# Altium PCB USB-hub.PcbDoc
Units mil, origin at the board's own origin, x right, y up, seen from the top; angles counter-clockwise.
Board outline 2875 x 1565 mil, 2 copper layers (Top Layer, Bottom Layer); 51 components, 40 nets, 205 pads, 202 vias.
Unrouted connection lines stored in the file: 3.
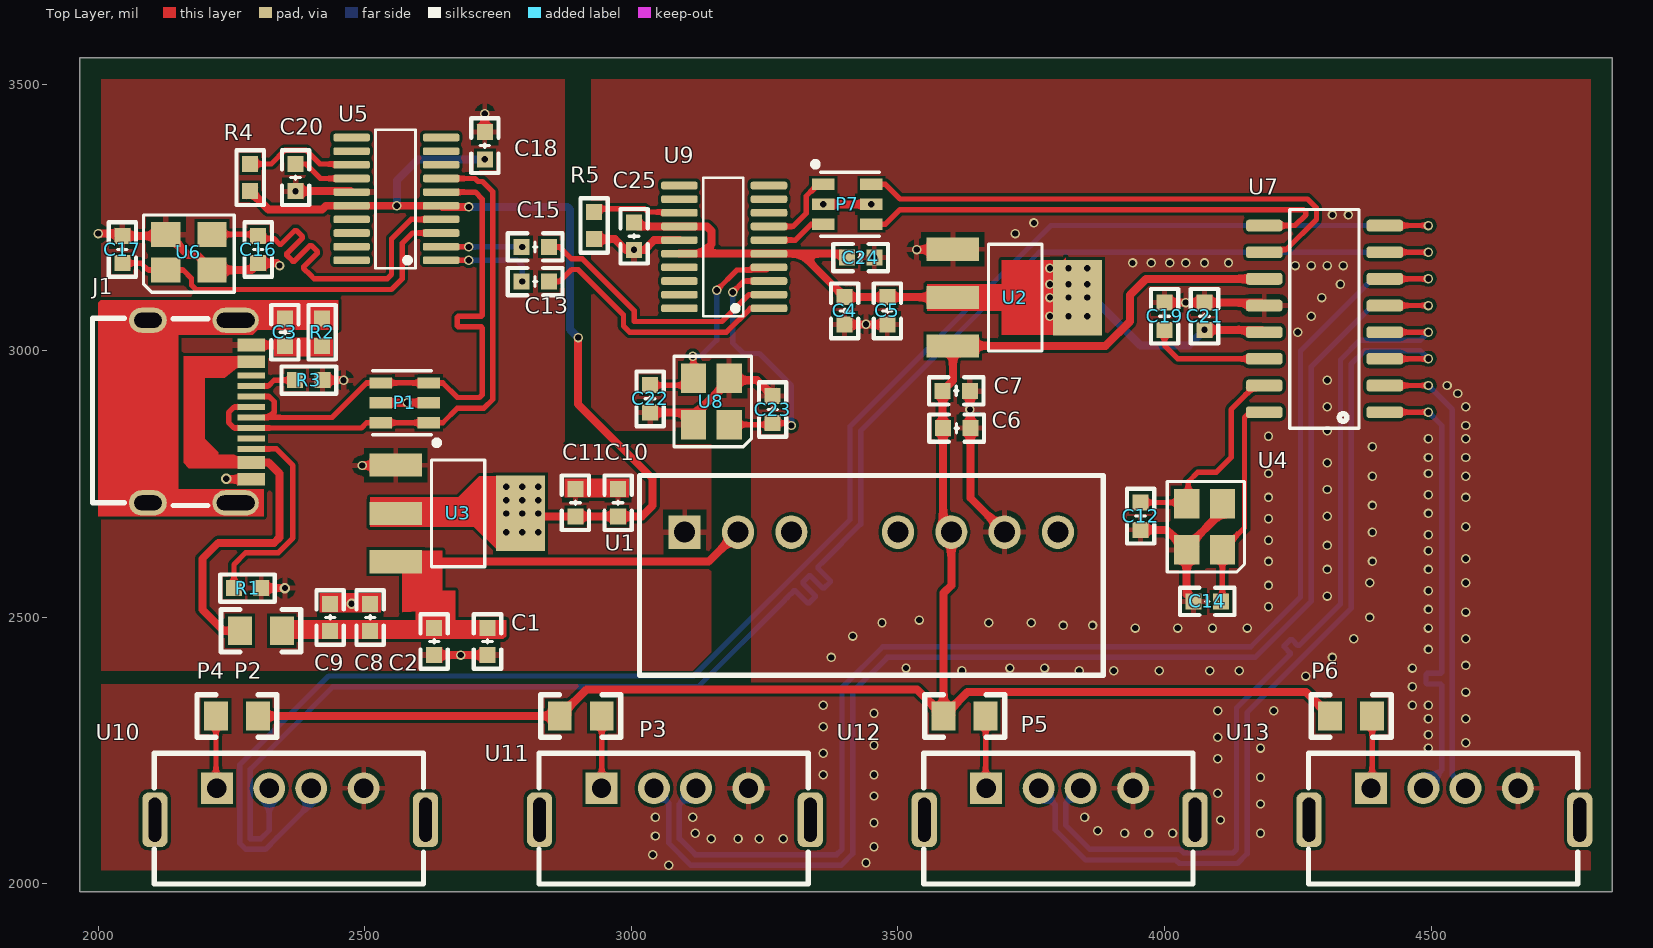
[diagram p0: Top Layer view]
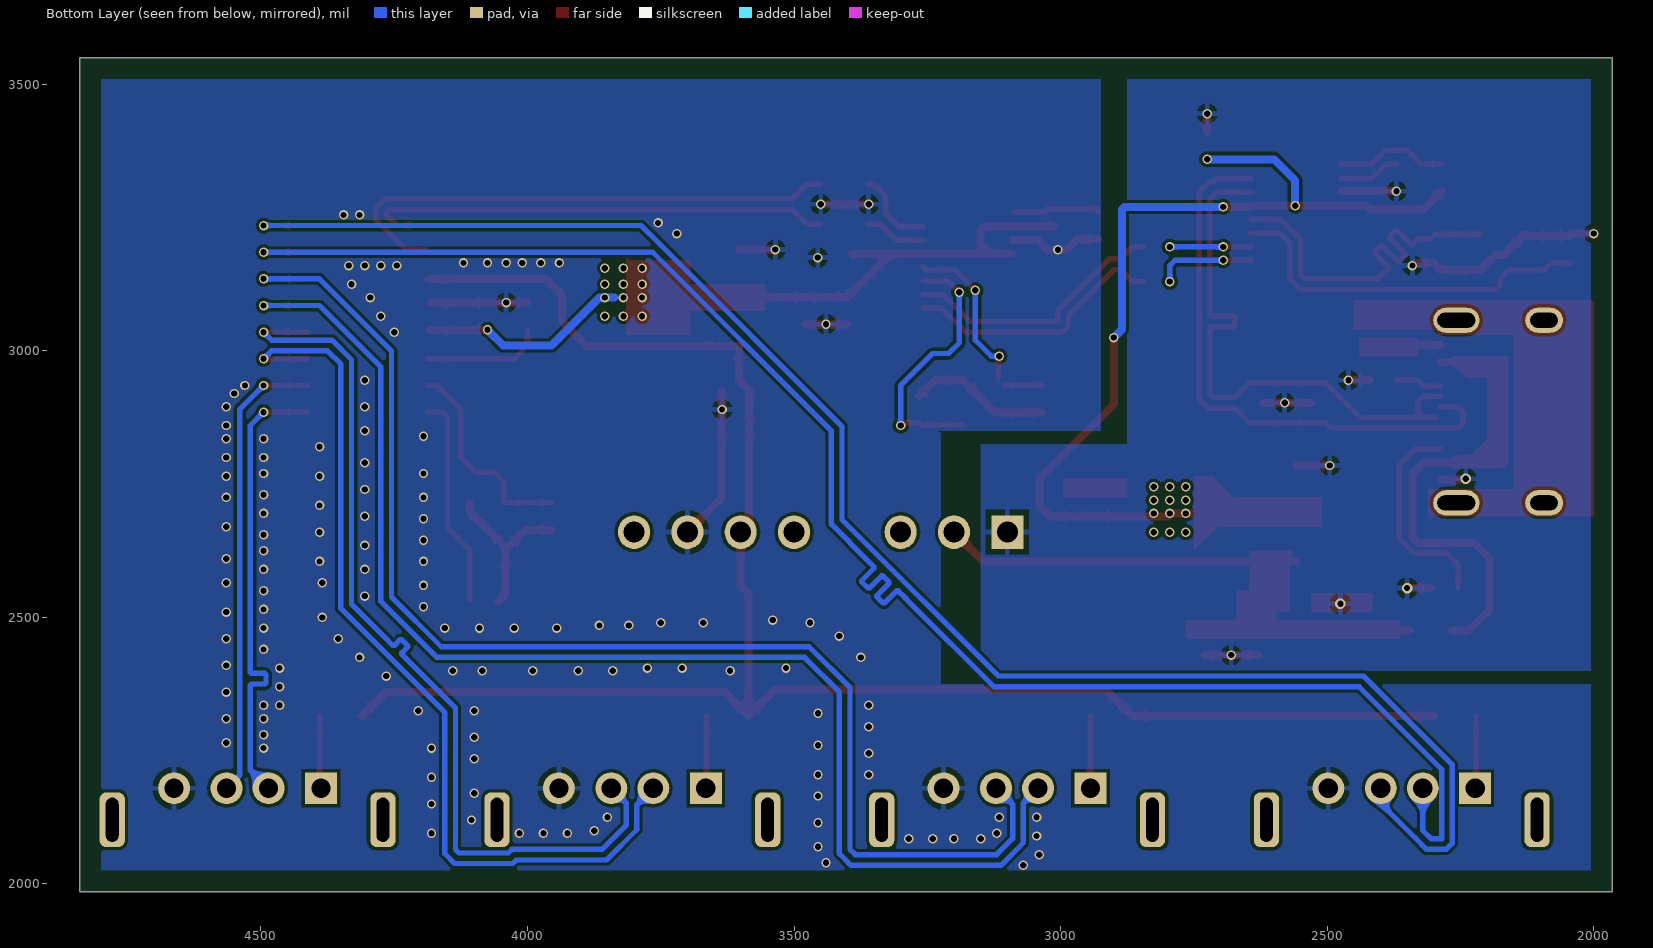
[diagram p1: Bottom Layer view, seen from below]
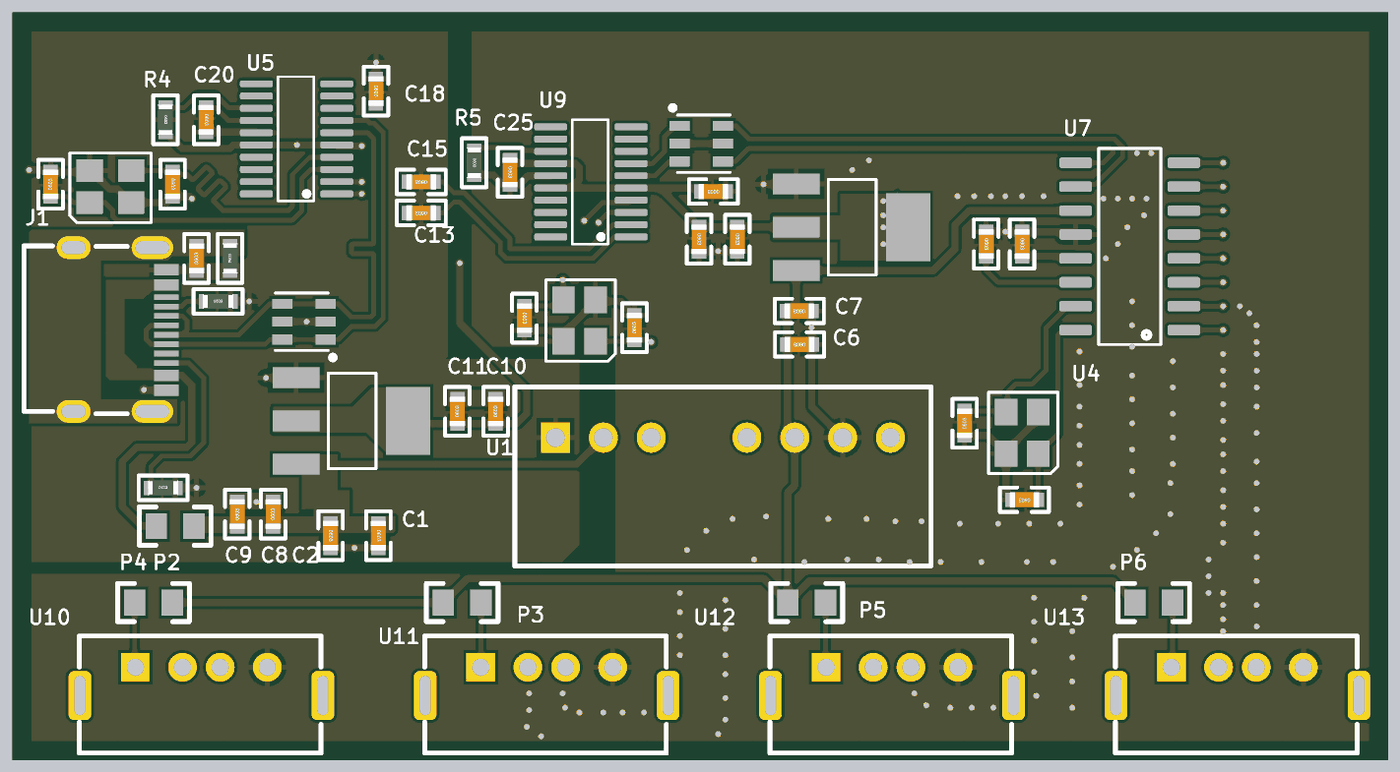
[diagram p2: 3D render of the assembled board from above, using the file's embedded part models]

## Layer stack, top to bottom
Top Solder: solder mask 0.4, Solder Resist, Dk 3.5
Top Layer: signal copper 1.4
Dielectric 1: dielectric 12.6, FR-4, Dk 4.8
Bottom Layer: signal copper 1.4
Bottom Solder: solder mask 0.4, Solder Resist, Dk 3.5

## Board outline
1965,1985 4840,1985 4840,3550 1965,3550

## Design rules (kind name [scope] priority, off if disabled: settings)
BoardOutlineClearance [All] p1: gap=40
Clearance Clearance_TypeC_J1 [InComponent('J1') vs InComponent('J1')] p1: gap=0
Clearance Clearance_1 [All] p2: gap=6
DiffPairsRouting [All] p1: maxlimit=10 minlimit=10 mostfreqgap=10 toplayer_minwidth=10 toplayer_maxwidth=10 toplayer_prefwidth=10 bottomlayer_minwidth=10 bottomlayer_maxwidth=10 bottomlayer_prefwidth=10 maxuncoupledlength=500
MinimumSolderMaskSliver [All] p1: minsoldermaskwidth=3.2
PolygonConnect [All] p1: connectstyle=Relief reliefconductorwidth=10 reliefentries=4 polygonreliefangle="90 Angle" airgapwidth=10
RoutingVias [All] p1: holewidth=12 width=20 viastyle="Through Hole" minholewidth=11.81 minwidth=15.75 maxholewidth=30 maxwidth=50
SilkToSilkClearance [All] p1: silktosilkclearance=0
SilkToSolderMaskClearance [IsPad] p1: minsilkscreentomaskgap=0 clearancetoexposedcopper=TRUE
SolderMaskExpansion [All] p1: expansion=0
Width [InNetClass('chafen1')] p1: maxlimit=10 minlimit=10 preferedwidth=10
Width power_GND [InNetClass('power')] p2: maxlimit=25 minlimit=15 preferedwidth=20
Width Width_1 [All] p3: maxlimit=10 minlimit=10 preferedwidth=10
26 further rules are at their usual default settings.

## Classes and differential pairs
net class power: +5V_ISO +5V_PRI GND_ISO GND_PRI USB_SHIELD_PRI VBUS_PRI VDD33_ISO VDD33_PRI
net class chafen1: USB_DM_ISO USB_DM_PRI
differential pair class chafen1: NewDifferentialPair1 NewDifferentialPair2 NewDifferentialPair3 NewDifferentialPair4 NewDifferentialPair5 NewDifferentialPair6 NewDifferentialPair7 NewDifferentialPair8 NewDifferentialPair9 NewDifferentialPair10
differential pair NewDifferentialPair1: +USB_DP_PRI -USB_DM_PRI
differential pair NewDifferentialPair2: +1.XO -1.XI
differential pair NewDifferentialPair3: +1.DPX -1.DMX
differential pair NewDifferentialPair4: +2.DPX -2.DMX
differential pair NewDifferentialPair5: +2.XI -2.XO
differential pair NewDifferentialPair6: +USB_DP_ISO -USB_DM_ISO
differential pair NewDifferentialPair7: +XIN -XOUT
differential pair NewDifferentialPair8: +USB2_DP -USB2_DM
differential pair NewDifferentialPair9: +USB3_DM -USB3_DP
differential pair NewDifferentialPair10: +USB4_DP -USB4_DM

## Components (designator, comment, footprint, x,y, rotation, side; value= is the part's Value field where it differs from the comment)
C1 "10uF" "C 0603_L" 2730,2455 r270 top
C2 "0.1uF" "C 0603_L" 2630,2455 r270 top
C3 "1nF" "C 0603_L" 2350,3035 r90 top
C4 "10uF" "C 0603_L" 3400,3075 r270 top
C5 "0.1uF" "C 0603_L" 3480,3075 r270 top
C6 "10uF" "C 0603_L" 3610,2855 r180 top
C7 "0.1uF" "C 0603_L" 3609.41,2925 r180 top
C8 "10uF" "C 0603_L" 2510,2500 r90 top
C9 "0.1uF" "C 0603_L" 2435,2500 r90 top
C10 "10uF" "C 0603_L" 2975,2715 r90 top
C11 "0.1uF" "C 0603_L" 2895,2715 r90 top
C12 "20pF" "C 0603_L" 3955,2690 r90 top
C13 "0.1uF" "C 0603_L" 2819.41,3130 r180 top
C14 "20pF" "C 0603_L" 4080,2530 r180 top
C15 "0.1uF" "C 0603_L" 2819.41,3195 r180 top
C16 "30pF" "C 0603_L" 2300,3190 r270 top
C17 "30pF" "C 0603_L" 2045,3190 r90 top
C18 "1uF" "C 0603_L" 2725,3385 r270 top
C19 "4.7uF" "C 0603_L" 4000,3065 r270 top
C20 "0.1uF" "C 0603_L" 2370,3325 r270 top
C21 "4.7uF" "C 0603_L" 4075,3065 r270 top
C22 "30pF" "C 0603_L" 3035,2910 r270 top
C23 "30pF" "C 0603_L" 3265,2890 r90 top
C24 "1uF" "C 0603_L" 3430,3175 r180 top
C25 "0.1uF" "C 0603_L" 3005,3215 r270 top
J1 "U262‑16P‑BH" USB-hub 2190,2885 r270 top
P1 "Header 3X2" SOT-6 2574.76,2902.6 r90 top
P2 "SMD0805B100TF" SMD0805B100TF 2305,2475 r0 top
P3 "SMD0805B100TF" SMD0805B100TF 2905,2315 r0 top
P4 "SMD0805B100TF" SMD0805B100TF 2260,2315 r180 top
P5 "SMD0805B100TF" SMD0805B100TF 3625,2315 r0 top
P6 "SMD0805B100TF" SMD0805B100TF 4350,2315 r0 top
P7 "Header 3X2" SOT-6 3405,3275 r270 top
R1 "5.1k" "R 0603_L" 2280,2555 r0 top
R2 "1M" "R 0603_L" 2420,3035 r90 top
R3 "5.1k" "R 0603_L" 2395,2945 r0 top
R4 "5.1k" "R 0603_L" 2285,3325 r270 top
R5 "5.1k" "R 0603_L" 2930,3235 r270 top
U1 "VRB0505S‑5WR3" VRB0505S_5WR3 3450,2660 r0 top
U2 "AMS1117-3.3" AMS1117-3.3 3720,3100 r180 top
U3 "AMS1117-3.3" AMS1117-3.3 2675,2695 r180 top
U4 "C20617584" C20617584 4075,2670 r90 top
U5 "CH318T" CH318T 2530,3285 r90 top
U6 "C20617584" C20617584 2170,3185 r0 top
U7 "HUBSL2.1A" HUBSL2.1A 4300,3060 r90 top
U8 "C20617584" C20617584 3150,2905 r90 top
U9 "CH318T" CH318T 3145,3195 r90 top
U10 "usb" usb 2360,2150 r0 top
U11 "usb" usb 3081.67,2150 r0 top
U12 "usb" usb 3803.33,2150 r0 top
U13 "usb" usb 4525,2150 r0 top

## Footprints (in the part's own frame and the unit in brackets; to place one, negate y for a bottom-side part, rotate by r counter-clockwise, add the part's x,y. Pads: shape width x height; smd on the part's side, far side on the other; paste and mask are expansions set on the pad)
AMS1117-3.3 [mm]
  rect 2.5x1.1 smd: 1(2.97,-2.3) 2(2.97,0) 3(2.97,2.3)
  rect 2.34x3.6 smd: 4(-2.97,0)
  silkscreen extent -1.27,-2.54 1.27,2.54
C20617584 [mm]
  rect 1.4x1.2 smd: 1(-1.1,-0.85) 2(1.1,-0.85) 3(1.1,0.85) 4(-1.1,0.85)
  silkscreen extent -2.16,-1.91 2.16,1.78
"C 0603_L" [mil] "无极性贴片电容                                       淘宝ID:黄晶宝石"
  rect 30x30 smd: 1(-25.59,0) 2(25.59,0)
  silkscreen extent -51,-26 51,26, body extent -31,-16 31,16, height 32
CH318T [mm]
  rrect50% 0.364x1.742 smd: 1(-2.925,-2.871) 2(-2.275,-2.871) 3(-1.625,-2.871) 4(-0.975,-2.871) 5(-0.325,-2.871) 6(0.325,-2.871) 7(0.975,-2.871) 8(1.625,-2.871) 9(2.275,-2.871) 10(2.925,-2.871) 11(2.925,1.397) 12(2.275,1.397) 13(1.625,1.397) 14(0.975,1.397) 15(0.325,1.397) 16(-0.325,1.397) 17(-0.975,1.397) 18(-1.625,1.397) 19(-2.275,1.397) 20(-2.925,1.397)
  silkscreen extent -3.3,-1.65 3.3,0.25
HUBSL2.1A [mm]
  rrect50% 0.56x1.745 smd: 1(-4.445,-2.872) 2(-3.175,-2.872) 3(-1.905,-2.872) 4(-0.635,-2.872) 5(0.635,-2.872) 6(1.905,-2.872) 7(3.175,-2.872) 8(4.445,-2.872) 9(4.445,2.872) 10(3.175,2.872) 11(1.905,2.872) 12(0.635,2.872) 13(-0.635,2.872) 14(-1.905,2.872) 15(-3.175,2.872) 16(-4.445,2.872)
  silkscreen extent -5.21,-1.65 5.21,1.65
"R 0603_L" [mil] "1/10W贴片电阻                 淘宝ID:黄晶宝石"
  rect 30x30 smd: 1(-25.59,0) 2(25.59,0)
  silkscreen extent -51,-26 51,26, body extent -31,-16 32,16, height 16
SMD0805B100TF [mm]
  rect 1.133x1.377 smd: 1(-1,0) 2(1,0)
  silkscreen extent -1.91,-1.02 1.91,1.02
SOT-6 [mm]
  rect 0.532x1.072 smd: 1(-0.95,-1.149) 2(0,-1.149) 3(0.95,-1.149) 4(0.95,1.149) 5(0,1.149) 6(-0.95,1.149)
  silkscreen extent -2.03,-1.65 1.52,1.52
usb [mil]
  rect 60x60 hole 35.98: 1(-137.8,29.57)
  round 60 hole 35.98: 2(-39.41,29.57) 3(39.41,29.57) 4(137.8,29.57)
  rrect50% 47.24x102.36 hole 23.62 slot 82.68 at 90 deg: 5(-253.9,-29.57) 6(253.9,-29.57)
  silkscreen extent -255,-150 250,95
USB-hub [mm]
  oval 1.2x2.2 hole 0.7 slot 1.8 at 90 deg: 13(4.32,1.719) 16(-4.379,1.719)
  oval 1.2x1.8 hole 0.7 slot 1.3 at 90 deg: 14(4.32,-2.461) 15(-4.379,-2.461)
  rect 0.6x1.3 smd: A1B12(-3.2,2.461) A4B9(-2.4,2.461) B1A12(3.2,2.461) B4A9(2.4,2.461)
  rect 0.3x1.3 smd: A5(-1.25,2.461) A6(-0.25,2.461) A7(0.25,2.461) A8(1.25,2.461) B5(1.75,2.461) B6(0.75,2.461) B7(-0.75,2.461) B8(-1.75,2.461)
  silkscreen extent -4.47,-5.1 4.44,0.38
VRB0505S_5WR3 [mm]
  rect 1.524x1.6 hole 1: 1(-8.89,0)
  oval 1.524x1.6 hole 1: 2(-6.35,0) 3(-3.81,0) 5(1.27,0) 6(3.81,0) 7(6.35,0) 8(8.89,0)
  silkscreen extent -11.05,-6.83 11.05,2.7

## Part data
C1 C2 C3 C4 C5 C6 C7 C8 C9 C10 C11 C12 C13 C14 C15 C16 C17 C18 C19 C20 C21 C22 C23 C24 C25: library part C, "贴片电容"
J1: library part type_c
P1 P7: "Header, 3-Pin, Dual row"
R1 R2 R3 R4 R5: library part R, "贴片电阻"
U1: library part VRB0505S?5WR3

## Via types
v1: diameter 17.72, hole 11.81, Top Layer to Bottom Layer, tented both sides, 199 vias
v2: diameter 19.68, hole 11.81, Top Layer to Bottom Layer, tented both sides, 3 vias

## Nets (pads, with @x,y where several pads share a name; then routed paths per layer and width w, separated by ;. In a path a pad name is that pad's centre, name@x,y a point inside that pad or via, vN(x,y) a via of type N, cw(c..) or ccw(c..) an arc to the next point about the centre after c; other vN are vias at no path point)
1.DMX: C13.2 U5.1 | length 186.2
  Top Layer w10: U5.1 2682.32,3169.84 2682.48,3170 v1(2695,3170)
  Bottom Layer w10: v1(2695,3170) 2785,3170 2795,3160 v1(2795,3130)
1.DPX: C15.2 U5.2 | length 152.1
  Top Layer w10: U5.2 2682.32,3195.43 2682.76,3195 v1(2695,3195)
  Bottom Layer w10: v1(2695,3195) v1(2795,3195)
1.XI: C16.1 U5.4 U6.3 | length 708
  Top Layer w10: U6.3 C16.1@2297.13,3218.46 ; C16.1 2305,3210.59 2329.41,3210.59 2340,3200 2342.72,3200 2368.54,3225.82 2371.37,3225.82 2382.69,3214.51 2382.69,3211.68 2355.5,3184.5 2353.38,3182.38 2353.38,3179.55 2364.69,3168.23 2367.52,3168.23 2369.64,3170.36 2396.83,3197.54 2399.66,3197.54 2410.97,3186.23 2410.97,3183.4 2385.2,3157.63 2385.2,3154.8 2397.93,3142.07 2405,3135 2541.72,3135 2550,3143.28 2550,3210 2575.17,3235.17 2586.61,3246.61 U5.4
1.XO: C17.1 U5.3 U6.1 | length 708.9
  Top Layer w10: C17.1 2080.59,3164.41 2093.46,3151.54 U6.1 2159.25,3151.54 2174.75,3136.04 2174.75,3123.36 2183.11,3115 2405,3115 2550,3115 2570,3135 2570,3201.72 2589.31,3221.02 U5.3
2.DMX: C13.1 U9.1 | length 501.8
  Top Layer w10: C13.1 2865,3130 2887.5,3152.5 2900,3152.5 2985,3067.5 2985,3046.72 2996.72,3035 3178.28,3035 3223.13,3079.84 U9.1
2.DPX: C15.1 U9.2 | length 504.1
  Top Layer w10: C15.1 2865,3195 2887.5,3172.5 2908.28,3172.5 3005,3075.78 3005,3055 3170,3055 3220.43,3105.43 U9.2
2.XI: C22.1 U8.3 U9.4 | length 375.9
  Top Layer w10: C22.1 U8.3@3103.82,2935.59 ; U8.3 v1@3116.54,2988.46 ; v1(3160,3113.75) 3197.86,3151.61 3253.03,3151.61 U9.4
  Bottom Layer w10: v1(3115,2990) 3130,2990 3160,3020 v1(3160,3113.75)
2.XO: C23.1 U8.1 U9.3 | length 499.3
  Top Layer w10: U8.1 C23.1@3262.29,2861.69 ; v1(3190,3110) 3211.02,3131.02 U9.3 ; C23.1 v1@3295.59,2864.41
  Bottom Layer w10: v1(3190,3110) 3190,3015 3210,2995 3240,2995 3300,2935 v1(3300,2860)
+5V_ISO: C6.2 C7.2 P3.1 P4.1 P5.1 P6.1 U1.6 U2.3 U7.11 | length 3470.2
  Top Layer w15: P4.1 P3.1 2915.63,2365 3535.63,2365 P5.1 ; U7.11 3965,3135 3935,3105 3935,3055 3889.45,3009.45 U2.3 3603.07,2944.25 C7.2 3583.82,2855.6 C6.2 3584.41,2675.59 U1.6 3600,2560 3585.63,2545.63 P5.1 ; P6.1 4265.63,2360 3630.63,2360 P5.1
+5V_PRI: C1.1 C2.1 C8.1 C9.1 P2.2 U1.2 U3.3 | length 1043.8
  Top Layer w15: P2.2 C8.1@2509.41,2475 ; C8.1 C2.1@2623.81,2474.41 ; U3.3 3144.45,2604.45 U1.2 ; C2.1 C1.1
GND_ISO: C4.2 C5.2 C6.1 C7.1 C12.1 C14.2 C19.1 C21.1 C22.2 C23.2 C24.1 C25.2 P7.2 P7.5 R5.2 U1.7 U2.1 U4.2 U4.4 U7.12 U8.2 U8.4 U9.15 U10.4 U11.4 U12.4 U13.4 | length 1472.1
  Top Layer w15: R5.2 2969.41,3209.41 2989.41,3189.41 v1(3005,3189.41) 3024.41,3189.41 3042.8,3207.8 U9.15 ; C22.2 3122.91,2884.41 3183.46,2944.96 3235.63,2944.96 C23.2 ; P7.2 P7.5 ; C4.2 C5.2 ; v1(3535,3190) U2.1@3602.52,3190 ; v1(3635,2890) C7.1 ; v1@3635.59,2889.41 C6.1 3635.59,2724.41 U1.7 ; C12.1 4003.82,2664.41 U4.4 ; C19.1 v1(4040,3090.59) C21.1 U7.12@4181.34,3090.59 ; C14.2 4041.54,2542.88 U4.4 ; U4.2 4108.46,2698.46 4041.54,2631.54 U4.4
  other v1: 3070,2035 3440,2040 3040,2055 3455,2070 3150,2085 3200,2085 3240,2085 3285,2085 3045,2090 3120,2095 3925,2095 3970,2095 4015,2095 4180,2095 3875,2100 3455,2115 4105,2120 3045,2125 3115,2125 3850,2125 4180,2150 3455,2165 4100,2170 4180,2200 3360,2205 3455,2205 4100,2235 3360,2245 4180,2255 4495,2255 3455,2260 4565,2265 4100,2275 4495,2280 3360,2295 4495,2310 4565,2310 3455,2320 4100,2325 4205,2325 3360,2335 4465,2335 4495,2335 4565,2360 4465,2370 4265,2390 3620,2400 3840,2400 3905,2400 3990,2400 4085,2400 4140,2400 3515,2405 3710,2405 3775,2405 4465,2405 4565,2410 3375,2425 4315,2425 4495,2440 4355,2460 4565,2460 3415,2465 3945,2480 4025,2480 4090,2480 4155,2480 4495,2480 3810,2485 3865,2485 3470,2490 3670,2490 3750,2490 3540,2495 4385,2500 4565,2510 4495,2515 4195,2520 4305,2540 4495,2550 4195,2560 4385,2565 4565,2565 4305,2590 4495,2590 4195,2605 4390,2605 4565,2610 4495,2625 4305,2635 4195,2645 4495,2655 4390,2660 4565,2670 4195,2685 4305,2690 4495,2695 4390,2710 4195,2725 4565,2725 4495,2730 4305,2740 4390,2765 4565,2765 4195,2770 4495,2770 4305,2790 4495,2800 4565,2800 4390,2820 4495,2835 4565,2835 4195,2840 4305,2850 4565,2860 4305,2895 4565,2895 4550,2920 4530,2935 4305,2945 4250,3035 3440,3050 4275,3065 4295,3100 4330,3125 4245,3160 4275,3160 4305,3160 4335,3160 3940,3165 3975,3165 4010,3165 4040,3165 4075,3165 4120,3165 3455.59,3175 3720,3220 3755,3240 4315,3255 4345,3255 3360,3275 3450,3275
GND_PRI: C1.2 C2.2 C3.1 C8.2 C9.2 C10.2 C11.2 C16.2 C17.2 C18.1 C20.2 J1.A1B12 J1.B1A12 P1.2 P1.5 R1.2 R2.1 R3.2 U1.1 U3.1 U5.15 U6.2 U6.4 | length 1024.6
  Top Layer w15: v1(2000,3220) 2040.59,3220 C17.2 U6.4@2123.82,3215.59 ; U6.4 2130.04,3218.46 2168.5,3180 2184.84,3180 U6.2 2287.12,3151.54 C16.2 v1@2335.59,3164.41 ; v2@2240.98,2759.02 J1.B1A12 ; J1.A1B12 C3.1@2348.43,3010.98 ; R1.2 v2(2350,2555) ; v1(2370,3299.41) U5.15@2473.38,3299.41 ; R3.2 v1(2460,2945) ; C9.2 C8.2 ; v1(2495,2785) U3.1@2557.52,2785 ; P1.5 P1.2 ; C2.2 C1.2 ; C18.1 v1(2725,3445)
  other v1: 2680,2429.41 2579.76,2902.6 2340,3160
  other v2: 2475,2525.59 2240,2760
NetC19_2: C19.2 U7.14 | length 226.7
  Top Layer w10: C19.2 4000,3010 4025,2985 U7.14
NetC20_1: C20.1 U5.14 | length 116.3
  Top Layer w10: C20.1 2389.41,3350.59 2416.61,3323.39 U5.14
NetJ1_A5: J1.A5 R3.1 | length 87
  Top Layer w10: J1.A5 2319.21,2934.21 2330,2945 R3.1
NetJ1_B5: J1.B5 R1.1 | length 402.6
  Top Layer w10: R1.1 2254.41,2599.41 2276.5,2621.5 2337.66,2621.5 2365,2648.84 2365,2785 2333.9,2816.1 J1.B5
NetP3_2: P3.2 U11.1 | length 134.9
  Top Layer w10: U11.1@2944.37,2180.07 P3.2
NetP4_2: P4.2 U10.1 | length 133.9
  Top Layer w10: U10.1@2220.63,2181.14 P4.2
NetP5_2: P5.2 U12.1 | length 134.3
  Top Layer w10: U12.1@3664.37,2180.73 P5.2
NetP6_2: P6.2 U13.1 | length 133.3
  Top Layer w10: U13.1@4389.37,2181.73 P6.2
NetR4_1: R4.1 U5.13 | length 212.2
  Top Layer w10: R4.1 2324.44,3350.59 2350.44,3376.59 2389.55,3376.59 2415.55,3350.59 2473.38,3350.59 U5.13
NetR5_1: R5.1 U9.13 | length 166.9
  Top Layer w10: R5.1 2930,3266.59 3024.55,3266.59 3030.55,3260.59 U9.13@3088.38,3260.59
USB1_DM: U7.7 U10.2 | length 3183
  Top Layer w10: U7.7 v1(4495,3185)
  Bottom Layer w10: U10.2 2320.59,2100.59 2305,2085 2285,2085 2285,2215 2440,2370 3125,2370 3285,2530 3292.07,2537.07 3304.8,2549.8 3307.63,2549.8 3330.45,2526.97 3333.28,2526.97 3344.59,2538.29 3344.59,2541.12 3321.77,2563.94 3321.77,2566.77 3333.08,2578.08 3335.91,2578.08 3358.74,2555.26 3361.57,2555.26 3372.88,2566.57 3372.88,2569.4 3350.05,2592.23 3350.05,2595.05 3360,2605 3430,2675 3430,2850 3765,3185 v1(4495,3185)
USB1_DP: U7.8 U10.3 | length 3183.5
  Top Layer w10: U7.8 v1(4495,3235)
  Bottom Layer w10: U10.3 2399.41,2151.13 2334.73,2086.45 2313.28,2065 2276.72,2065 2265,2076.72 2265,2223.28 2431.72,2390 3116.72,2390 3410,2683.28 3410,2858.28 3750.86,3199.14 3786.72,3235 v1(4495,3235)
USB2_DM: U7.5 U11.2 | length 2508.9
  Top Layer w10: U7.5 v1(4495,3085)
  Bottom Layer w10: U11.2 3070,2151.82 3070,2076.72 3111.72,2035 3393.28,2035 3415,2056.72 3415,2360 3480,2425 4170,2425 4275,2530 4275,2970 4390,3085 v1(4495,3085)
USB2_DP: U7.6 U11.3 | length 2503.2
  Top Layer w10: U7.6 v1(4495,3135)
  Bottom Layer w10: U11.3 3119.57,2179.57 3090,2150 3090,2085 3120,2055 3385,2055 3395,2065 3395,2368.28 3471.72,2445 4161.72,2445 4255,2538.28 4255,2970 4255,3000 4390,3135 v1(4495,3135)
USB3_DM: U7.3 U12.2 | length 1727.2
  Top Layer w10: U7.3 v1(4495,2985)
  Bottom Layer w10: U12.2 3795,2148.49 3795,2101.72 3851.72,2045 4020.94,2045 4027.69,2038.25 4136.54,2038.25 4155,2056.72 4155,2321.72 4244.14,2410.86 4350,2516.72 4350,2975 4375,3000 4480,3000 v1(4495,2985)
USB3_DP: U7.4 U12.3 | length 1727
  Top Layer w10: U7.4 v1(4495,3035)
  Bottom Layer w10: U12.3 3815,2151.82 3815,2110 3860,2065 4029.22,2065 4035.97,2058.25 4128.25,2058.25 4135,2065 4135,2330 4230,2425 4235.66,2430.66 4235.66,2433.49 4224.7,2444.44 4224.7,2447.27 4236.01,2458.58 4238.84,2458.58 4249.8,2447.63 4252.63,2447.63 4265.36,2460.36 4267.5,2462.5 4330,2525 4330,2983.28 4366.72,3020 4480,3020 v1(4495,3035)
USB4_DM: U7.1 U13.2 | length 866.4
  Top Layer w10: U7.1 v1(4495,2885)
  Bottom Layer w10: U13.2 4520,2213.98 4520,2365 4520,2373 4518,2375 4492.42,2375 4490.42,2377 4490.42,2393 4492.42,2395 4518,2395 4520,2397 4520,2400 4520,2860 v1(4495,2885)
USB4_DP: U7.2 U13.3 | length 866.1
  Top Layer w10: U7.2 v1(4495,2935)
  Bottom Layer w10: v1(4495,2935) 4540,2890 4540,2860 4540,2203.98 U13.3
USB_DM_ISO: P7.3 P7.4 U7.9 U9.6 | length 1033.6
  Top Layer w10: U9.6 3307.8,3207.8 3337.6,3237.6 P7.3 ; P7.4 3476.34,3237.6 3503.74,3265 4260,3265 4265,3260 4265,3255 4245,3235 U7.9
USB_DM_PRI: J1.A7 J1.B7 P1.3 P1.4 U5.6 | length 1084
  Top Layer w10: J1.B7 2320.47,2914.53 2330,2905 2330,2885 2320.16,2875.16 ; J1.A7@2295.49,2875.16 2320.16,2875.16 ; U5.6 2707.2,3297.8 2720,3285 2720,3100 2720,3067 2718,3065 2675.38,3065 2673.38,3063 2673.38,3047 2675.38,3045 2718,3045 2720,3043 2720,3035 2720,2917.6 2715,2912.6 2673.5,2912.6 2646.1,2940 P1.3 P1.4 2503.43,2940 2438.58,2875.16 2320.16,2875.16
USB_DP_ISO: P7.1 P7.6 U7.10 U9.7 | length 1151.7
  Top Layer w10: U9.7 3303.39,3233.39 3327.66,3257.66 3327.66,3290.03 3350.03,3312.4 P7.1 ; P7.6 3476.34,3312.4 3503.74,3285 4268.28,3285 4285,3268.28 4285,3246.72 4228.28,3190 4191.93,3190 U7.10
USB_DP_PRI: J1.A6 J1.B6 P1.1 P1.6 U5.7 | length 1084.2
  Top Layer w10: J1.A6 2254.84,2894.84 2244.53,2884.53 2244.53,2865.47 2254.53,2855.47 J1.B6 2287.2,2855.16 2493.39,2855.16 2503.43,2865.2 P1.6 P1.1 2646.1,2865.2 2673.5,2892.6 2723.28,2892.6 2740,2909.31 2740,3298.28 2720.49,3317.8 2712.2,3317.8 2706.61,3323.39 U5.7
USB_SHIELD_PRI: C3.2 J1.13 J1.14 J1.15 J1.16 R2.2
VBUS_PRI: J1.A4B9 J1.B4A9 P2.1 | length 897.3
  Top Layer w10: J1.A4B9@2282.2,2974.8 J1.A4B9
  Top Layer w15: P2.1 2235,2475 2195,2515 2195,2610 2225,2640 2330,2640 2340,2650 2340,2770 2319.49,2790.51 J1.B4A9 2219.49,2790.51 2180,2830 2180,2955 2204.49,2979.49 J1.A4B9
VDD33_ISO: C4.1 C5.1 C21.2 C24.2 C25.1 U2.2 U2.4 U7.13 U9.5 U9.14 U9.16 | length 1206.6
  Top Layer w15: C25.1@3012.2,3233.39 U9.14 3141.61,3233.39 3150,3225 3150,3200 3132.2,3182.2 ; U9.16 3132.2,3182.2 ; C24.2@3392.21,3182.2 3318.39,3182.2 ; U2.2@3602.48,3100.59 C5.1 C4.1 3318.39,3182.2 ; v1(4075,3039.41) U7.13@4182.52,3039.41 ; 3132.2,3182.2 U9.5 3318.39,3182.2
  Bottom Layer w15: 3836.93,3100 3865,3100 3955,3010 4045.58,3010 v1(4075,3039.41)
  other v1: 3785,3065 3820,3065 3855,3065 3785,3100 3820,3100 3855,3100 3785,3125 3820,3125 3855,3125 3785,3155 3820,3155 3855,3155
VDD33_PRI: C10.1 C11.1 C18.2 R4.2 U3.2 U3.4 U5.5 U5.16 | length 1953.4
  Top Layer w15: R4.2 2319.41,3265 2420,3265 2427.2,3272.2 U5.16 v1(2560,3272.2) U5.5 2645.24,3270 v1(2695,3270) ; U3.2 U3.4 ; U3.4@2797.52,2689.41 C11.1 C10.1 3019.41,2689.41 3040,2710 3040,2760 2900,2900 v1(2900,3025)
  Bottom Layer w15: v1(2560,3272.2) 2560,3320 2599.41,3359.41 v1(2725,3359.41) ; v1(2695,3270) 2880,3270 2885,3265 2885,3040 v1(2900,3025)
  other v1: 2765,2660 2795,2660 2825,2660 2765,2695 2795,2695 2825,2695 2765,2720 2795,2720 2825,2720 2765,2745 2795,2745 2825,2745
XIN: C14.1 U4.1 U7.16 | length 400.4
  Top Layer w10: C14.1@4108.46,2532.87 U4.1 4150,2668.23 4150,2875 4160,2885 U7.16
XOUT: C12.2 U4.3 U7.15 | length 392.5
  Top Layer w10: C12.2 U4.3@4039.26,2715.59 ; U4.3@4044.41,2716.18 4044.41,2754.41 4062.5,2772.5 4097.5,2772.5 4125,2800 4125,2890 4170,2935 U7.15
pads on no net: J1.A8 J1.B8 U1.3 U1.5 U1.8 U5.8 U5.9 U5.10 U5.11 U5.12 U5.17 U5.18 U5.19 U5.20 U9.8 U9.9 U9.10 U9.11 U9.12 U9.17 U9.18 U9.19 U9.20 U10.5 U10.6 U11.5 U11.6 U12.5 U12.6 U13.5 U13.6

## Polygon pours and split planes (outlines as drawn)
GND_PRI on Top Layer "GND_PRI_L01_P000" (solid, remove dead copper, pour order 0): 1965,3550 2875,3550 2875,2830 2870,2825 3150,2825 3150,2435 3115,2400 1965,2400 1965,3550
GND_ISO on Top Layer "GND_ISO_L01_P006" (solid, remove dead copper, pour order 6): 2925,3550 4840,3550 4840,1985 1965,1985 1965,2375 3225,2375 3225,2850 2925,2850 2925,3550
GND_ISO on Bottom Layer "GND_ISO_L02_P004" (solid, remove dead copper, pour order 4): 2925,3550 2925,2850 3230,2850 3225,2845 3225,2375 1965,2375 1965,1985 4840,1985 4840,3550 2925,3550
GND_PRI on Bottom Layer "GND_PRI_L02_P002" (solid, remove dead copper, pour order 2): 1965,3550 2875,3550 2875,2825 3150,2825 3150,2395 3145,2400 1965,2400 1965,3550

## Other copper
Top Layer:
  region net VDD33_ISO: 3555,3125 3555,3075 3695,3075 3695,3030 3815,3030 3815,3175 3810,3170 3695,3170 3695,3125
  region net VDD33_PRI: 2670,2670 2690,2670 2700,2670 2705,2670 2705,2685 2670,2685
  region net VDD33_PRI: 2510,2725 2675,2725 2670,2720 2670,2670 2510,2670
  region net VDD33_PRI: 2605,2715 2665,2715 2715,2765 2750,2765 2750,2625 2700,2675 2605,2675
  region net USB_SHIELD_PRI: 2305,3095 2305,3045 2290,3030 2150,3030 2150,2740 2310,2740 2310,2690 2000,2690 2000,3090 2005,3095 2045,3095
  region net USB_SHIELD_PRI: 2305,3095 2445,3095 2450,3095 2450,3040 2300,3040 2297.5,3037.5
  region net VBUS_PRI: 2265,2990 2160,2990 2160,2790 2170,2780 2265,2780 2265,2800 2255,2805 2225,2805 2225,2810 2200,2835 2200,2950 2237.5,2950 2265,2972
  region net +5V_PRI: 2365,2495 2595,2495 2595,2535 2670,2535 2670,2495 2765,2495 2765,2465 2760,2460 2365,2460
  region net GND_PRI: 2330,3025 2440,3025 2440,2990 2330,2990
  region net GND_PRI: 2875,2760 2995,2760 2995,2725 2875,2725
  region net GND_PRI: 2415,2545 2415,2510 2530,2510 2530,2545
  region net +5V_PRI: 2565,2625 2570,2597.52 2570,2510 2670,2515 2670,2535 2670,2550 2645,2550 2645,2560.01 2645,2625

## Silkscreen, mask and mechanical layers (free items; w line width, h text height)
Mechanical 1:
  the board outline again, w5.98